# Altium PCB XbeeLight.PcbDoc
Units mil, origin at the board's own origin, x right, y up, seen from the top; angles counter-clockwise.
Board outline 6000 x 4000 mil, 2 copper layers (Top Layer, Bottom Layer); 81 components, 75 nets, 247 pads, 0 vias.
Unrouted connection lines stored in the file: 164.
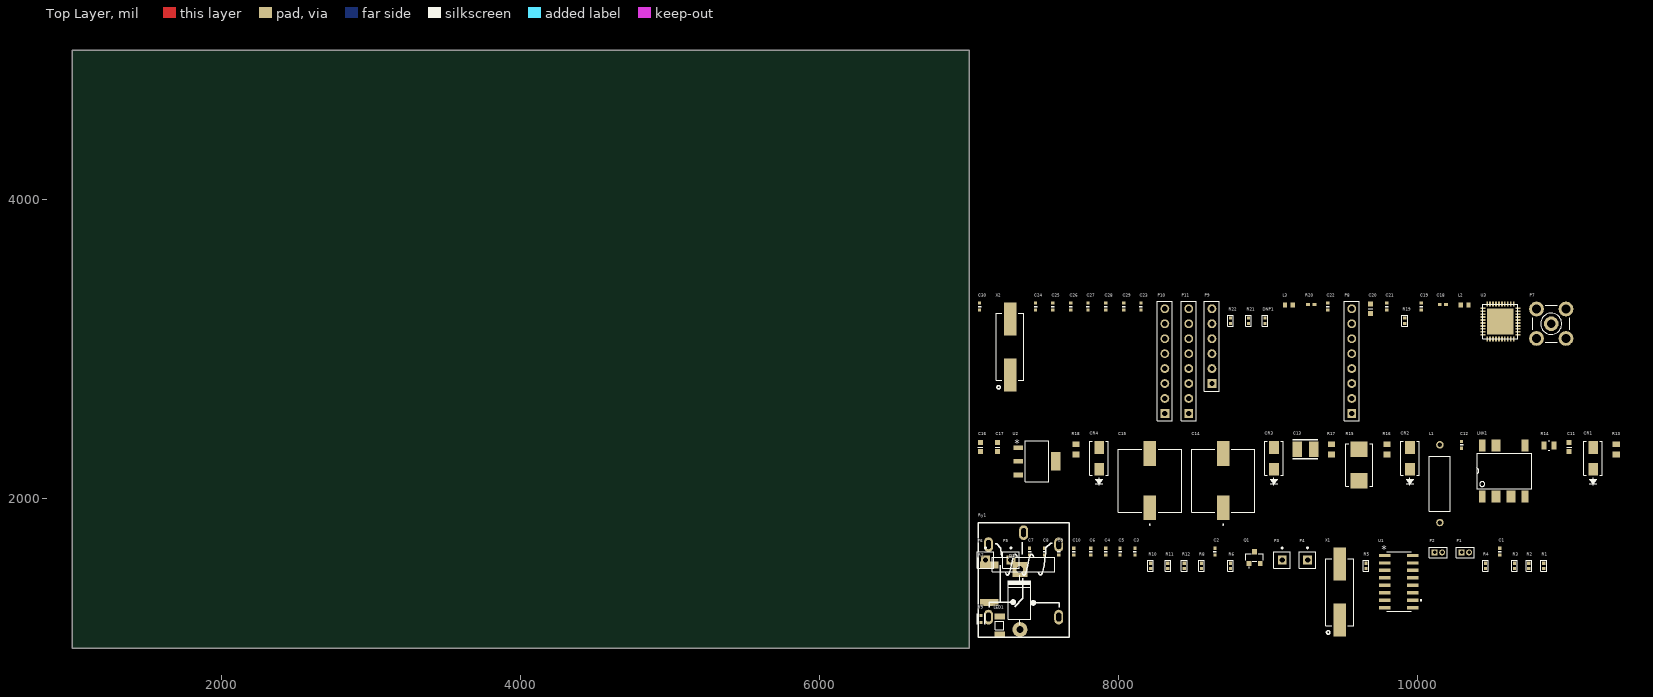
[diagram p0: Top Layer view]
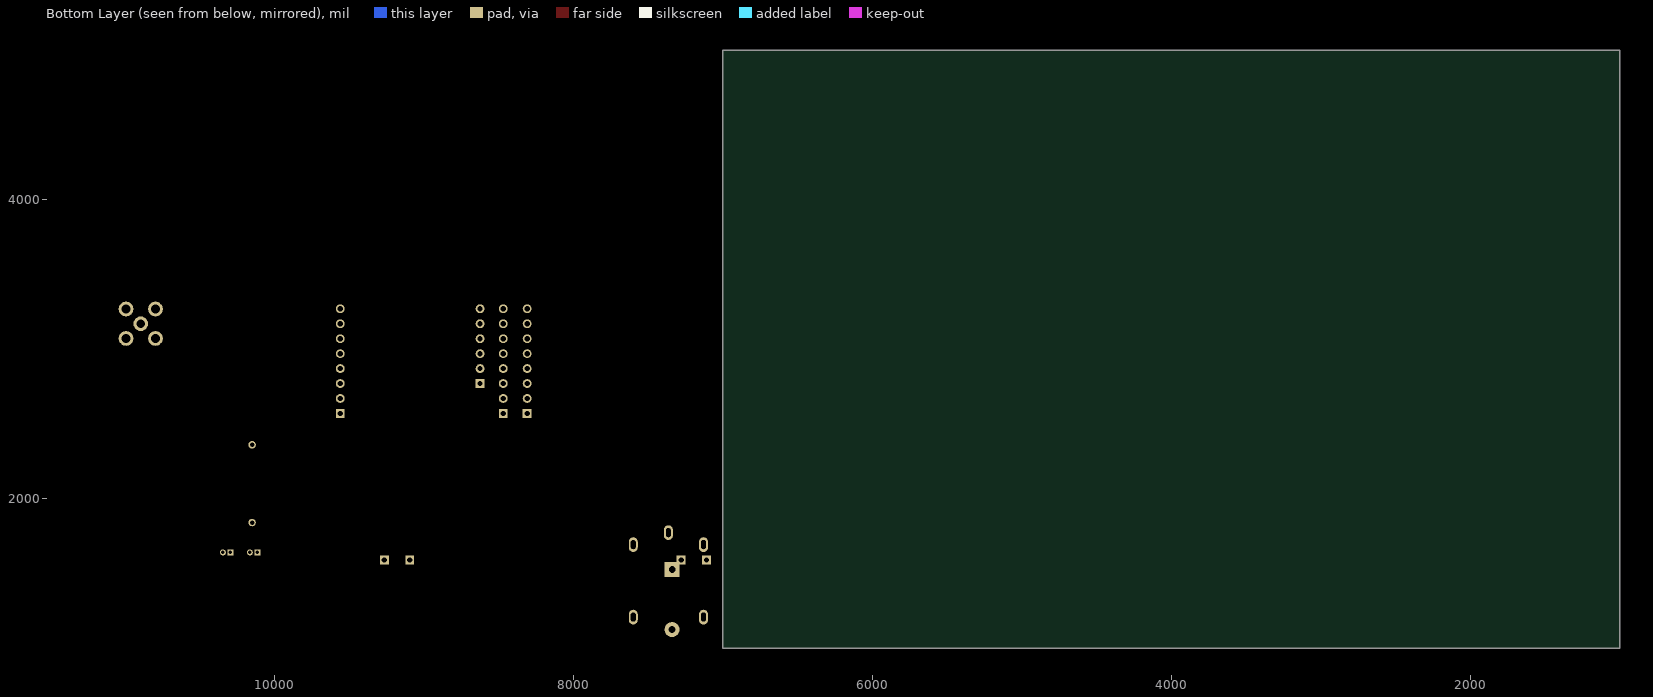
[diagram p1: Bottom Layer view, seen from below]

## Layer stack, top to bottom
Top Solder: solder mask 0.4, Solder Resist, Dk 3.5
Top Layer: signal copper 1.4
Dielectric 1: dielectric 12.6, FR-4, Dk 4.8
Bottom Layer: signal copper 1.4
Bottom Solder: solder mask 0.4, Solder Resist, Dk 3.5

## Board outline
1000,1000 7000,1000 7000,5000 1000,5000

## Design rules (kind name [scope] priority, off if disabled: settings)
Clearance [All] p1: gap=10 ignorepadtopadclearanceinfootprint=FALSE except(0: Arc-Hole Track-Hole SMDPad-Hole THPad-Hole Via-Hole Fill-Hole Poly-Hole Region-Hole Text-Hole)
PolygonConnect [All] p1: connectstyle=Relief reliefconductorwidth=10 reliefentries=4 polygonreliefangle="90 Angle" airgapwidth=10
RoomDefinition XBeeLight [InComponentClass('XBeeLight')] p1: confinementstyle=ConfineIn formatcopy=TRUE lockcomponents=FALSE outline 7045,2510 11055,2510 11055,3385 7045,3385
RoomDefinition PowerMngt [InComponentClass('PowerMngt')] p2: confinementstyle=ConfineIn formatcopy=TRUE lockcomponents=FALSE outline 7045,1795 11375,1795 11375,2460 7045,2460
RoomDefinition PowerMeasurement [InComponentClass('PowerMeasurement')] p3: confinementstyle=ConfineIn formatcopy=TRUE lockcomponents=FALSE outline 7045,1060 10875,1060 10875,1745 7045,1745
RoutingVias [All] p1: holewidth=28 width=50 viastyle="Through Hole" minholewidth=28 minwidth=50 maxholewidth=28 maxwidth=50
SolderMaskExpansion [All] p1: expansion=4
Width [All] p1: maxlimit=10 minlimit=10 preferedwidth=10
30 further rules are at their usual default settings.

## Classes and differential pairs
component class XBeeLight: C18 C19 C20 C21 C22 C23 C24 C25 C26 C27 C28 C29 C30 DNP1 L2 L3 P7 P8 P9 P10 P11 R19 R20 R21 R22 U3 X2
component class PowerMngt: C11 C12 C13 C14 C15 C16 C17 CR1 CR2 CR3 CR4 L1 LNK1 R13 R14 R15 R16 R17 R18 U2
component class PowerMeasurement: C1 C2 C3 C4 C5 C6 C7 C8 C9 C10 D1 LED1 P1 P2 P3 P4 P5 P6 Q1 R1 R2 R3 R4 R5 R6 R7 R8 R9 R10 R11 R12 Ry1 U1 X1

## Components (designator, comment, footprint, x,y, rotation, side; value= is the part's Value field where it differs from the comment)
C1 "0.10µF" SMD-0402C 10550,1645 r0 top
C2 "0.10µF" SMD-0402C 8645,1645 r0 top
C3 "0.10µF" SMD-0402C 8110,1645 r0 top
C4 "0.022µF" SMD-0402C 7915,1645 r0 top
C5 "0.022µF" SMD-0402C 8010,1645 r0 top
C6 "0.10µF" SMD-0402C 7815,1645 r0 top
C7 "220pF" SMD-0402C 7405,1645 r0 top
C8 "220pF" SMD-0402C 7505,1645 r0 top
C9 "220pF" SMD-0402C 7600,1645 r0 top
C10 "220pF" SMD-0402C 7700,1645 r0 top
C11 "1µF" SMD-0603C 11015,2345 r0 top
C12 "0.10µF" SMD-0402C 10295,2360 r0 top
C13 "47µF" SMD-1210C 9250,2330 r0 top
C14 "4.7uF 400V" CAP_PAN_EEE_G17 8700,2120 r90 top value=Value
C15 "4.7uF 400V" CAP_PAN_EEE_G17 8210,2120 r90 top value=Value
C16 "10µF" SMD-0603C 7075,2345 r0 top
C17 "10µF" SMD-0603C 7190,2345 r0 top
C18 "47pF" CC0402N 10170,3300 r0 top value=Value
C19 "0.10µF" SMD-0402C 10025,3285 r0 top
C20 "10µF" SMD-0603C 9685,3270 r0 top
C21 "0.10µF" SMD-0402C 9795,3285 r0 top
C22 "0.10µF" SMD-0402C 9400,3285 r0 top
C23 "15pF" SMD-0402C 8150,3285 r0 top
C24 "0.10µF" SMD-0402C 7445,3285 r0 top
C25 "0.10µF" SMD-0402C 7560,3285 r0 top
C26 "0.10µF" SMD-0402C 7680,3285 r0 top
C27 "0.10µF" SMD-0402C 7795,3285 r0 top
C28 "47pF" SMD-0402C 7915,3285 r0 top
C29 "0.10µF" SMD-0402C 8035,3285 r0 top
C30 "15pF" SMD-0402C 7070,3285 r0 top
CR1 "S1M-13-F" SMA 11175,2270 r90 top value=Value
CR2 "S1M-13-F" SMA 9950,2270 r90 top value=Value
CR3 "US1J-13-F" SMA 9040,2270 r90 top value=Value
CR4 "S1M-13-F" SMA 7870,2270 r90 top value=Value
D1 "1N4007" D2A 7340,1325 r90 top
DNP1 "10K" "MCS 0402" 8980,3190 r90 top
L1 "1.5mH 130mA" AIAP-01 10150,2360 r90 top value=Value
L2 "5.1uH" INDC1005X45 10315,3295 r0 top
L3 "3.9nH" INDC1005X45 9140,3295 r0 top
LED1 "Blue LED SMD" "1206 Blue LED SMD" 7205,1150 r90 top
LNK1 "LNK302GN-TL" SMD-8B 10580,2185 r90 top
P1 "MHDR1X2" MHDR1X2 10295,1640 r0 top
P2 "MHDR1X2" MHDR1X2 10115,1640 r0 top
P3 "Plug" PIN1 9095,1590 r0 top
P4 "Plug" PIN1 9265,1590 r0 top
P5 "Plug" PIN1 7280,1590 r0 top
P6 "Plug" PIN1 7110,1590 r0 top
P7 "SMB" SMB_V-RJ45 10895,3170 r0 top
P8 "Header 8" HDR1X8 9560,2570 r90 top
P9 "Header 6" HDR1X6 8625,2770 r90 top
P10 "Header 8" HDR1X8 8310,2570 r90 top
P11 "Header 8" HDR1X8 8470,2570 r90 top
Q1 "S8050" SI2305TP 8910,1605 r0 top
R1 "422K" "MCS 0402" 10845,1550 r90 top
R2 "4K7" "MCS 0402" 10745,1550 r90 top
R3 "100R" "MCS 0402" 10650,1550 r90 top
R4 "422K" "MCS 0402" 10455,1550 r90 top
R5 "422K" "MCS 0402" 9655,1550 r90 top
R6 "422K" "MCS 0402" 8750,1550 r90 top
R7 "0.002" SMD-2512-RES 7135,1430 r90 top
R8 "1K" "MCS 0402" 8555,1550 r90 top
R9 "0.0" SMD-0402-RES 7080,1195 r0 top
R10 "1K" "MCS 0402" 8215,1550 r90 top
R11 "1K" "MCS 0402" 8330,1550 r90 top
R12 "1K" "MCS 0402" 8440,1550 r90 top
R13 "11K" RC0805N 11330,2330 r90 top value=Value
R14 "1K82" RES_ERA6A_0805 10880,2355 r0 top value=Value
R15 "8.2 2W" RES_SMF2_TYCO 9610,2225 r90 top value=Value
R16 "220R" RC0805N 9795,2330 r90 top value=Value
R17 "3K3" RC0805N 9425,2330 r90 top value=Value
R18 "220R" RC0805N 7715,2330 r90 top value=Value
R19 "10K" "MCS 0402" 9915,3190 r90 top
R20 "43K 1%" RC0402N 9290,3300 r0 top value=Value
R21 "10K" "MCS 0402" 8870,3190 r90 top
R22 "10K" "MCS 0402" 8750,3190 r90 top
Ry1 "Relay" SRD-05VDC-SL-C 7365,1490 r90 top
U1 "CS5490-ISZ" CIR-SOIC-16_W150 9875,1445 r0 top value=Value
U2 "LM1117-3.3V" MP04A 7455,2250 r0 top value=Value
U3 "JN5168/A02Z" QFN50P600X600X100-41N_JN5168/A02Z(Primary) 10555,3185 r0 top
X1 "4.096MHZ" XTAL_ABLS2-4.096MHZ-D4Y-T 9480,1375 r90 top
X2 "4.096MHZ" XTAL_ABLS2-4.096MHZ-D4Y-T 7275,3015 r90 top

## Footprints (in the part's own frame and the unit in brackets; to place one, negate y for a bottom-side part, rotate by r counter-clockwise, add the part's x,y. Pads: shape width x height; smd on the part's side, far side on the other; paste and mask are expansions set on the pad)
"1206 Blue LED SMD" [mm] "Led SMD Blanco"
  rect 1x1.8 smd: 1(-1.5,0) 2(1.575,0)
  silkscreen extent -0.7,-0.7 0.77,0.72, body extent -1.47,-0.8 1.73,0.8, height 0.7
AIAP-01 [mil]
  round 50 hole 30 mask+0: 1(-520,0) 2(0,0)
  silkscreen extent -445,-70 -75,70, body extent 0,0 10,10, height 10
CAP_PAN_EEE_G17 [mil]
  rect 166x83 smd paste+0 mask+0: 1(-181,0) 2(181,0)
  silkscreen extent -297,-212 212,212, body extent 0,0 10,10, height 10
CC0402N [mil]
  rect 26x20 smd paste+0 mask+0: 1(-21,0) 2(21,0)
  body extent 0,0 10,10, height 10
CIR-SOIC-16_W150 [mil]
  rect 78x22 smd paste+0 mask+0: 1(-93,175) 2(-93,125) 3(-93,75) 4(-93,25) 5(-93,-25) 6(-93,-75) 7(-93,-125) 8(-93,-175) 9(93,-175) 10(93,-125) 11(93,-75) 12(93,-25) 13(93,25) 14(93,75) 15(93,125) 16(93,175)
  silkscreen extent -82,-200 152,200, body extent 0,0 10,10, height 10
D2A [mil] "Diode 2A, W 150mil, L 450mil"
  round 100 hole 45: 1(-201.3,-0.4)
  rect 100x100 hole 45: 2(201.49,0.59)
  silkscreen extent -169,-74 161,76, body extent -213,-53 217,48, height 100
HDR1X6 [mm] "Connector; Header; 6 Position"
  rect 1.5x1.5 hole 0.9: 1(0,0)
  round 1.5 hole 0.9: 2(2.54,0) 3(5.08,0) 4(7.62,0) 5(10.16,0) 6(12.7,0)
  silkscreen extent -1.27,-1.27 13.97,1.27
HDR1X8 [mm] "Connector; Header; 8 Position"
  rect 1.5x1.5 hole 0.9: 1(0,0)
  round 1.5 hole 0.9: 2(2.54,0) 3(5.08,0) 4(7.62,0) 5(10.16,0) 6(12.7,0) 7(15.24,0) 8(17.78,0)
  silkscreen extent -1.27,-1.27 19.05,1.27
INDC1005X45 [mm]
  rect 0.7x0.9 smd: 1(-0.65,0) 2(0.65,0)
"MCS 0402" [mm]
  rect 0.55x0.55 smd: 1(-0.45,0) 2(0.45,0)
  silkscreen extent -0.92,-0.48 0.95,0.48, body extent -0.5,-0.25 0.5,0.25, height 0.32
MHDR1X2 [mm] "Connector; Header; 2 Position"
  rect 1x1 hole 0.6: 1(0,0)
  round 1 hole 0.6: 2(1.27,0)
  silkscreen extent -0.9,-0.9 2.17,0.9
MP04A [mil]
  rect 63x33 smd paste+0 mask+0: 1(-126,90.55) 2(-126,0) 3(-126,-90.55)
  rect 63x122 smd paste+0 mask+0: 4(126,0)
  silkscreen extent -78,-137 78,137, body extent 0,0 10,10, height 10
PIN1 [mm] "Connector; Plug"
  rect 1.5x1.5 hole 0.9: 1(0,0)
  silkscreen extent -1.4,-1.4 1.4,2.17
QFN50P600X600X100-41N_JN5168/A02Z(Primary) [mm]
  rect 0.85x0.3 smd: 1(-3,2.25) 2(-3,1.75) 3(-3,1.25) 4(-3,0.75) 5(-3,0.25) 6(-3,-0.25) 7(-3,-0.75) 8(-3,-1.25) 9(-3,-1.75) 10(-3,-2.25) 21(3,-2.25) 22(3,-1.75) 23(3,-1.25) 24(3,-0.75) 25(3,-0.25) 26(3,0.25) 27(3,0.75) 28(3,1.25) 29(3,1.75) 30(3,2.25)
  rect 0.3x0.85 smd: 11(-2.25,-3) 12(-1.75,-3) 13(-1.25,-3) 14(-0.75,-3) 15(-0.25,-3) 16(0.25,-3) 17(0.75,-3) 18(1.25,-3) 19(1.75,-3) 20(2.25,-3) 31(2.25,3) 32(1.75,3) 33(1.25,3) 34(0.75,3) 35(0.25,3) 36(-0.25,3) 37(-0.75,3) 38(-1.25,3) 39(-1.75,3) 40(-2.25,3)
  rect 4.5x4.5 smd: EXP(0,0)
  silkscreen extent -2.97,-2.97 2.97,2.97
RC0402N [mm]
  rect 0.656x0.5 smd paste+0 mask+0: 1(-0.553,0) 2(0.553,0)
  body extent 0,0 0.25,0.25, height 0.25
RC0805N [mm]
  rect 1.006x1.2 smd paste+0 mask+0: 1(-0.853,0) 2(0.853,0)
  body extent 0,0 0.25,0.25, height 0.25
RES_ERA6A_0805 [mil]
  rect 34x53 smd paste+0 mask+0: 1(-34.5,0) 2(34.5,0)
  silkscreen extent -5,-32 5,32, body extent 0,0 10,10, height 10
RES_SMF2_TYCO [mil]
  rect 102.5x114 smd paste+0 mask+0: 1(-106.25,0) 2(106.25,0)
  silkscreen extent -143,-90 143,90, body extent 0,0 10,10, height 10
SI2305TP [mm]
  rect 0.8x0.9 smd: 1(-0.95,-1) 2(0.95,-1) 3(0,1)
  silkscreen extent -1.46,-1.75 1.46,0.65
SMA [mm]
  rect 2.18x1.63 smd paste+0 mask+0: 1(-1.857,0) 2(1.857,0)
  silkscreen extent -4.57,-1.59 2.92,1.59, body extent 0,0 0.25,0.25, height 0.25
SMB_V-RJ45 [mm] "Connector; SMB Straight"
  round 2.5 hole 1.5: 1(0,0) 2(-2.5,-2.5) 2(-2.5,2.5) 2(2.5,-2.5) 2(2.5,2.5)
  silkscreen extent -3.15,-3.15 3.15,3.15
SMD-8B [mil]
  rect 80x60 smd: BP(-170,-47) S2(-170,54) S3(170,54)
  rect 80x46 smd: D(170,-139.25) FB(-170,-139.25) S1(-170,146.75) S4(170,146.75)
  silkscreen extent -120,-184 120,184
SMD-0402-RES [mm]
  rect 0.55x0.55 smd: 1(0,0.584) 2(0,-0.584)
  silkscreen extent -0.6,-0.9 0.6,0.9, body extent -0.28,-0.57 0.27,0.58, height 0.41
SMD-0402C [mm]
  rect 0.55x0.55 smd: 1(0,0.584) 2(0,-0.584)
  silkscreen extent -0.25,0 0.25,0, body extent -0.25,-0.51 0.25,0.51, height 0.51
SMD-0603C [mm]
  rect 0.85x0.85 smd: 1(0,0.775) 2(0,-0.775)
  silkscreen extent -0.4,0 0.4,0, body extent -0.4,-0.8 0.4,0.8, height 0.9
SMD-1210C [mm]
  rect 1.6x2.7 smd: 1(-1.4,0) 2(1.4,0)
  silkscreen extent -2.12,-1.63 2.12,1.63, body extent -2,-1.22 2,1.27, height 1.7
SMD-2512-RES [mil]
  rect 49x125 smd: 1(-125.5,0) 2(125.5,0)
  silkscreen extent -125,-75 125,75, body extent -125,-59 125,59, height 63
SRD-05VDC-SL-C [mil] "Relevador compacto de 1 polo, 2 tiros (SPDT) y bobina de 5 Vcc"
  oval 98.43x60 hole 31.5 slot 59.06 at 0 deg: 1(202.5,-235) 2(202.5,235) 3(-282.5,235) 4(282.5,0) 5(-282.5,-235)
  silkscreen extent -418,-305 350,305, body extent -418,-305 338,301, height 591
XTAL_ABLS2-4.096MHZ-D4Y-T [mm]
  rect 5.6x2.1 smd: 1(-4.75,0) 2(4.75,0)
  silkscreen extent -7.15,-2.35 5.7,2.35

## Part data
C1 C2 C3 C6 C12 C19 C21 C22 C24 C25 C26 C27 C29: library part GCM155R71C104KA55D, "CAP CER 0.1UF 16V X7R 0402", Digi-Key Part Number=490-4759-1-ND, Manufacturer="Murata Electronics North America", Operating Temperature="-55°C ~ 125°C", Package / Case="0402 (1005 Metric)", Ratings=AEC-Q200, Temperature Coefficient=X7R, Tolerance=±10%, Voltage=16V, @ qty=0, Applications=Automotive, Datasheets=http://www.murata.com/~/media/webrenewal/support/library/catalog/products/capacitor/mlcc/c03e.ashx, Factory Stock=0, Features=-, Height - Seated (Max)=-, Image=//media.digikey.com/Renders/Murata%20Renders/ZRB-SERIES-0402.jpg, Lead Spacing=-, Lead Style=-, Minimum Quantity=1, Mounting Type="Surface Mount, MLCC", Packaging="Cut Tape (CT)", Part Number=GCM155R71C104KA55D, Part Status=Active, Quantity Available=734194, Series=GCM, Size / Dimension="0.039\" L x 0.020\" W (1.00mm x 0.50mm)", Thickness (Max)="0.022\" (0.55mm)", Unit Price (USD)=0.1
C4 C5: library part GCM155R71H223KA55D, "CAP CER 0.022UF 50V X7R 0402", Digi-Key Part Number=490-4763-1-ND, Manufacturer="Murata Electronics North America", Operating Temperature="-55°C ~ 125°C", Package / Case="0402 (1005 Metric)", Ratings=AEC-Q200, Temperature Coefficient=X7R, Tolerance=±10%, Voltage=50V, @ qty=0, Applications=Automotive, Datasheets=http://www.murata.com/~/media/webrenewal/support/library/catalog/products/capacitor/mlcc/c03e.ashx, Factory Stock=0, Features=-, Height - Seated (Max)=-, Image=//media.digikey.com/Renders/Murata%20Renders/ZRB-SERIES-0402.jpg, Lead Spacing=-, Lead Style=-, Minimum Quantity=1, Mounting Type="Surface Mount, MLCC", Packaging="Cut Tape (CT)", Part Number=GCM155R71H223KA55D, Part Status=Active, Quantity Available=203538, Series=GCM, Size / Dimension="0.039\" L x 0.020\" W (1.00mm x 0.50mm)", Thickness (Max)="0.022\" (0.55mm)", Unit Price (USD)=0.1
C7 C8 C9 C10: library part GCM1555C1H221JA16D, "CAP CER 220PF 50V NP0 0402", Digi-Key Part Number=490-4927-1-ND, Manufacturer="Murata Electronics North America", Operating Temperature="-55°C ~ 125°C", Package / Case="0402 (1005 Metric)", Ratings=AEC-Q200, Temperature Coefficient="C0G, NP0", Tolerance=±5%, Voltage=50V, @ qty=0, Applications=Automotive, Datasheets=http://www.murata.com/~/media/webrenewal/support/library/catalog/products/capacitor/mlcc/c03e.ashx, Factory Stock=0, Features=-, Height - Seated (Max)=-, Image=//media.digikey.com/Renders/Murata%20Renders/ZRB-SERIES-0402.jpg, Lead Spacing=-, Lead Style=-, Minimum Quantity=1, Mounting Type="Surface Mount, MLCC", Packaging="Cut Tape (CT)", Part Number=GCM1555C1H221JA16D, Part Status=Active, Quantity Available=20733, Series=GCM, Size / Dimension="0.039\" L x 0.020\" W (1.00mm x 0.50mm)", Thickness (Max)="0.022\" (0.55mm)", Unit Price (USD)=0.1
C11: library part GRM188R61C105MA12D, "CAP CER 1UF 16V X5R 0603", Digi-Key Part Number=490-10480-1-ND, Manufacturer="Murata Electronics North America", Operating Temperature="-55°C ~ 85°C", Package / Case="0603 (1608 Metric)", Ratings=-, Temperature Coefficient=X5R, Tolerance=±20%, Voltage=16V, @ qty=0, Applications="General Purpose", Datasheets=http://www.murata.com/~/media/webrenewal/support/library/catalog/products/capacitor/mlcc/c02e.pdf, Factory Stock=0, Features="Derating Recommended", Height - Seated (Max)=-, Image=//media.digikey.com/Renders/Murata%20Renders/ZRB-SERIES-0402.jpg, Lead Spacing=-, Lead Style=-, Minimum Quantity=1, Mounting Type="Surface Mount, MLCC", Packaging="Cut Tape (CT)", Part Number=GRM188R61C105MA12D, Part Status=Active, Quantity Available=3593, Series=GRM, Size / Dimension="0.063\" L x 0.031\" W (1.60mm x 0.80mm)", Thickness (Max)="0.035\" (0.90mm)", Unit Price (USD)=0.1
C13: library part GRM32EC81C476KE15L, "CAP CER 47UF 16V X6S 1210", Digi-Key Part Number=490-10531-1-ND, Manufacturer="Murata Electronics North America", Operating Temperature="-55°C ~ 105°C", Package / Case="0.126\" L x 0.098\" W (3.20mm x 2.50mm)", Ratings=-, Temperature Coefficient=X6S, Tolerance=±10%, Voltage=16V, @ qty=0, Applications="General Purpose", Datasheets=http://www.murata.com/~/media/webrenewal/support/library/catalog/products/capacitor/mlcc/c02e.pdf, Factory Stock=0, Failure Rate="Surface Mount, MLCC", Features="Derating Recommended", Height - Seated (Max)="0.106\" (2.70mm)", Image=//media.digikey.com/Renders/Murata%20Renders/1210-32E.jpg, Lead Spacing=-, Minimum Quantity=1, Mounting Type="1210 (3225 Metric)", Packaging="Cut Tape (CT)", Part Number=GRM32EC81C476KE15L, Part Status=Active, Quantity Available=396, Series=GRM, Size / Dimension=-, Thickness (Max)=-, Unit Price (USD)=0.73
C14 C15: library part EEV-EB2G4R7Q, "Imported", Built_By=EMA_UL_Team, C="Copyright (C) 2015 Accelerated Designs. All rights reserved", Manufacturer_Part_Number=EEV-EB2G4R7Q, RefDes=RefDes, Type=DEV, Vendor=Panasonic
C16 C17 C20: library part GRM188R60J106KE47D, "CAP CER 10UF 6.3V X5R 0603", Digi-Key Part Number=490-12538-1-ND, Manufacturer="Murata Electronics North America", Operating Temperature="-55°C ~ 85°C", Package / Case="0603 (1608 Metric)", Ratings=-, Temperature Coefficient=X5R, Tolerance=±10%, Voltage=6.3V, @ qty=0, Applications="General Purpose", Datasheets=http://www.murata.com/~/media/webrenewal/support/library/catalog/products/capacitor/mlcc/c02e.pdf, Factory Stock=0, Features=-, Height - Seated (Max)=-, Image=//media.digikey.com/Renders/Murata%20Renders/ZRB-SERIES-0402.jpg, Lead Spacing=-, Lead Style=-, Minimum Quantity=1, Mounting Type="Surface Mount, MLCC", Packaging="Cut Tape (CT)", Part Number=GRM188R60J106KE47D, Part Status=Active, Quantity Available=3805, Series=GRM, Size / Dimension="0.063\" L x 0.031\" W (1.60mm x 0.80mm)", Thickness (Max)="0.035\" (0.90mm)", Unit Price (USD)=0.13
C18: library part CC0402JRNPO9BN47, "Imported", Manufacturer_Part_Number=CC0402JRNPO9BN470, Built_By=EMA_UL_Team, C="Copyright (C) 2015 Accelerated Designs. All rights reserved", RefDes=RefDes, Type=DEV, Vendor=Yageo
C23 C30: library part GJM1555C1H150FB01D, "CAP CER 15PF 50V NP0 0402", Digi-Key Part Number=490-11191-1-ND, Manufacturer="Murata Electronics North America", Operating Temperature="-55°C ~ 125°C", Package / Case="0402 (1005 Metric)", Ratings=-, Temperature Coefficient="C0G, NP0", Tolerance=±1%, Voltage=50V, @ qty=0, Applications="RF, Microwave, High Frequency", Datasheets=http://www.murata.com/~/media/webrenewal/support/library/catalog/products/capacitor/mlcc/c02e.pdf, Factory Stock=0, Features="High Q, Low Loss", Height - Seated (Max)=-, Image=//media.digikey.com/Renders/Murata%20Renders/ZRB-SERIES-0402.jpg, Lead Spacing=-, Lead Style=-, Minimum Quantity=1, Mounting Type="Surface Mount, MLCC", Packaging="Cut Tape (CT)", Part Number=GJM1555C1H150FB01D, Part Status=Active, Quantity Available=36038, Series=GJM, Size / Dimension="0.039\" L x 0.020\" W (1.00mm x 0.50mm)", Thickness (Max)="0.022\" (0.55mm)", Unit Price (USD)=0.21
C28: library part GCM1555C1H470JA16D, "CAP CER 47PF 50V NP0 0402", Digi-Key Part Number=490-10670-1-ND, Manufacturer="Murata Electronics North America", Operating Temperature="-55°C ~ 125°C", Package / Case="0402 (1005 Metric)", Ratings=AEC-Q200, Temperature Coefficient="C0G, NP0", Tolerance=±5%, Voltage=50V, @ qty=0, Applications=Automotive, Datasheets=http://www.murata.com/~/media/webrenewal/support/library/catalog/products/capacitor/mlcc/c03e.ashx, Factory Stock=0, Features=-, Height - Seated (Max)=-, Image=//media.digikey.com/Renders/Murata%20Renders/ZRB-SERIES-0402.jpg, Lead Spacing=-, Lead Style=-, Minimum Quantity=1, Mounting Type="Surface Mount, MLCC", Packaging="Cut Tape (CT)", Part Number=GCM1555C1H470JA16D, Part Status=Active, Quantity Available=171, Series=GCM, Size / Dimension="0.039\" L x 0.020\" W (1.00mm x 0.50mm)", Thickness (Max)="0.022\" (0.55mm)", Unit Price (USD)=0.1
CR1 CR2 CR3 CR4 U1: "Imported", Built_By=EMA_UL_Team, RefDes=RefDes, Type=DEV
  CR1 CR2 CR4: C="Copyright (C) 2015 Accelerated Designs. All rights reserved", Manufacturer_Part_Number=S1M-13-F, Vendor="Diodes Inc"
  CR3: C="Copyright (C) 2015 Accelerated Designs. All rights reserved", Manufacturer_Part_Number=US1J-13-F, Vendor="Diodes Inc"
  U1: Manufacturer_Part_Number=CS5490-ISZ, Vendor="Cirrus Logic"
D1: "Diode 1A"
DNP1 R19 R21 R22: library part "10K Res", "Res Thin Film 0402 10K Ohm 0.5% 0.063W(1/16W) ±25ppm/C Molded SMD Automotive Punched T/R", Manufacturer=Panasonic, Manufacturer Part Number=ERA-2AED103X, Rated Power="0.063 W", Resistance="10 kO", Supplier Part Number 1=P10KDECT-ND, Temp Coefficient="±25 ppm/°C", Tolerance (%)="±0.5 %", ComponentLink1Description=https://datasheet.ciiva.com/43470/1776116-43470437.pdf, ComponentLink1URL=https://datasheet.ciiva.com/43470/1776116-43470437.pdf, ComponentLink2Description=https://datasheet.ciiva.com/7830/1776116-7830919.pdf, ComponentLink2URL=https://datasheet.ciiva.com/7830/1776116-7830919.pdf, ComponentLink3Description=https://datasheet.ciiva.com/30240/54aoa0000ce26-30240474.pdf, ComponentLink3URL=https://datasheet.ciiva.com/30240/54aoa0000ce26-30240474.pdf, ComponentLink4Description=https://datasheet.ciiva.com/46378/1776116-46378235.pdf, ComponentLink4URL=https://datasheet.ciiva.com/46378/1776116-46378235.pdf, Pricing 1="1=0.22, 10=0.188, 100=0.0735, 1000=0.0308, 2500=0.0282, 5000=0.0256 (USD)", Size Code=0402, Stock 1=99513, Supplier 1=Digi-Key
L1: library part AIAP-01-152K-T, "Imported", Built_By=EMA_UL_Team, Manufacturer_Part_Number=AIAP-01-152K-T, RefDes=RefDes, Type=DEV, Vendor=Abracon
L2: library part LQP15MN5N1B02D, "Inductor RF Chip Unshielded Thin Film 5.1nH 0.1nH 500MHz 13Q-Factor Ceramic 140mA 700mOhm DCR 0402 T/R", Package="0402 Murata", Digi-Key_Part_Number=490-6758-1-ND, Digi-Key_Purchase_URL=https://www.digikey.lk/product-detail/en/murata-electronics-north-america/LQP15MN5N1B02D/490-6758-1-ND/3845955?utm_source=snapeda&utm_medium=aggregator&utm_campaign=symbol, MF=Murata, MP=LQP15MN5N1B02D, SnapEDA_Link=https://www.snapeda.com/parts/LQP15MN5N1B02D/Murata%20Electronics%20North%20America/view-part/?ref=snap
L3: library part LQP15MN3N9B02D, "FIXED IND 3.9NH 170MA 500 MOHM", Current Rating=170mA, DC Resistance (DCR)="500 mOhm Max", Frequency - Self Resonant=6GHz, Frequency - Test=500MHz, Manufacturer=Murata, Operating Temperature="-40°C ~ 85°C", Package / Case="0402 (1005 Metric)", Q @ Freq="13 @ 500MHz", Standard Package=10,000, Supplier Part Number 1=490-1131-1-ND, Tolerance=±0.1nH, Catalog Drawings="LQP15M Series Top LQP15M Series Side", Category="Inductors, Coils, Chokes", ComponentLink1Description=http://search.murata.co.jp/Ceramy/image/img/PDF/ENG/L0075S0084LQP15M.pdf, ComponentLink1URL=http://search.murata.co.jp/Ceramy/image/img/PDF/ENG/L0075S0084LQP15M.pdf, ComponentLink2Description=https://www.murata.com/~/media/webrenewal/support/library/catalog/products/inductor/chip/o05e.ashx, ComponentLink2URL=https://www.murata.com/~/media/webrenewal/support/library/catalog/products/inductor/chip/o05e.ashx, ComponentLink3Description=http://www.jameco.com/Jameco/Products/ProdDS/1865137.pdf, ComponentLink3URL=http://www.jameco.com/Jameco/Products/ProdDS/1865137.pdf, ComponentLink4Description=https://www.murata.com/~/media/webrenewal/support/library/catalog/products/inductor/chip/o05e.ashx?la=en-us, ComponentLink4URL=https://www.murata.com/~/media/webrenewal/support/library/catalog/products/inductor/chip/o05e.ashx?la=en-us, ComponentLink5Description=http://uk.rs-online.com/webdocs/0f15/0900766b80f155d9.pdf, ComponentLink5URL=http://uk.rs-online.com/webdocs/0f15/0900766b80f155d9.pdf, Family="Fixed Inductors", Height - Seated (Max)="0.018\" (0.45mm)", Inductance=3.9nH, Manufacturer Part Number=LQP15MN3N9B02D, Material - Core=Non-Magnetic, Mounting Type="Surface Mount", Online Catalog="LQP Series", Other Names="490-1131-2   / LQP10A3N9B02T1", Packaging="Tape & Reel (TR)", Pricing 1="1=0.19, 10=0.173, 100=0.1152, 500=0.096, 1000=0.0807, 2500=0.0691 (USD)", Product Training Modules="Inductor Products Chip RF Inductors", Series=LQP15M, Shielding=Unshielded, Size / Dimension="0.039\" L x 0.020\" W (1.00mm x 0.50mm)", Stock 1=110804, Supplier 1=Digi-Key, Type="Thin Film"
LNK1: "IC OFFLINE SWIT OCP 8SMD", Frequency Range="62kHz ~ 70kHz", Manufacturer="Power Integrations", Operating Temperature="-40°C ~ 150°C", Package / Case="8-SMD (7 Leads), Gull Wing", Power (Watts)=12mW, Standard Package=1,000, Supplier Device Package=SMD-8B, Supplier Part Number 1=596-1020-1-ND, Voltage - Breakdown=700V, Voltage - Input=-, Category="Integrated Circuits (ICs)", ComponentLink1Description=http://www.powerint.com/sites/default/files/product-docs/lnk302_304-306.pdf, ComponentLink1URL=http://www.powerint.com/sites/default/files/product-docs/lnk302_304-306.pdf, ComponentLink2Description=https://www.power.com/sites/default/files/product-docs/lnk302_304-306.pdf, ComponentLink2URL=https://www.power.com/sites/default/files/product-docs/lnk302_304-306.pdf, ComponentLink3Description=http://www.power.com/sites/default/files/product-docs/lnk302_304-306.pdf, ComponentLink3URL=http://www.power.com/sites/default/files/product-docs/lnk302_304-306.pdf, Dynamic Catalog="AC DC Converters, Offline Switchers", Family="PMIC - AC DC Converters, Offline Switchers", Manufacturer Part Number=LNK302GN-TL, Online Catalog="AC DC Converters, Offline Switchers", Other Names="596-1020-2 / LNK302GNTL", Output Isolation=Non-Isolated, Packaging="Tape & Reel (TR)", Pricing 1="1=1.35, 10=1.193, 25=1.0776, 100=0.9428, 250=0.8273, 500=0.7311 (USD)", Reference Design Library="DER-092: 4 LEDs @ 40mA, 0.5W, 85 ~ 265VAC in", Series=LinkSwitch®-TN, Stock 1=53740, Supplier 1=Digi-Key, Voltage - Output=-
P1 P2: "Header, 2-Pin", LatestRevisionDate=17-Jul-2002, LatestRevisionNote="Re-released for DXP Platform.", Publisher="Altium Limited"
P7: "SMB Straight Connector", LatestRevisionDate=17-Jul-2002, LatestRevisionNote="Re-released for DXP Platform.", Publisher="Altium Limited"
P8 P10 P11: "Header, 8-Pin", LatestRevisionDate=17-Jul-2002, LatestRevisionNote="Re-released for DXP Platform.", Publisher="Altium Limited"
P9: "Header, 6-Pin", LatestRevisionDate=17-Jul-2002, LatestRevisionNote="Re-released for DXP Platform.", Publisher="Altium Limited"
Q1: library part MMSS8050-H-TP, "TRANS NPN 25V 1.5A SOT23", Current - Collector (Ic) (Max)=1.5A, Current - Collector Cutoff (Max)=100nA, DC Current Gain (hFE) (Min) @ Ic, Vce="120 @ 100mA, 1V", Frequency - Transition=100MHz, Manufacturer=MCC, Package / Case="TO-236-3, SC-59, SOT-23-3", Power - Max=625mW, Standard Package=3,000, Supplier Device Package=SOT-23, Supplier Part Number 1=MMSS8050-H-TPMSCT-ND, Voltage - Collector Emitter Breakdown (Max)=25V, Category="Discrete Semiconductor Products", ComponentLink1Description=http://www.mouser.com/ds/2/258/MMSS8050-255048.pdf, ComponentLink1URL=http://www.mouser.com/ds/2/258/MMSS8050-255048.pdf, ComponentLink2Description=http://www.mccsemi.com/up_pdf/MMSS8050(SOT-23).pdf, ComponentLink2URL=http://www.mccsemi.com/up_pdf/MMSS8050(SOT-23).pdf, Family="Transistors (BJT) - Single", Manufacturer Part Number=MMSS8050-H-TP, Mounting Type="Surface Mount", Online Catalog="NPN Transistors", Other Names="MMSS8050-H-TP-ND MMSS8050-H-TPMSTR MMSS8050HTP Q6289485", Packaging="Tape & Reel (TR)", Pricing 1="1=0.21, 10=0.19, 25=0.1728, 100=0.1246, 250=0.0734, 500=0.0609, 1000=0.0415 (USD)", Series=-, Stock 1=2136, Supplier 1=Digi-Key, Transistor Type=NPN, Vce Saturation (Max) @ Ib, Ic="500mV @ 80mA, 800mA"
R1 R4 R5 R6: "RESISTOR, THICK FILM, 422KOHM, 100mW, ± 1%", Manufacturer=Panasonic, Manufacturer Part Number=ERJ-2RKF4223X, Operating Temperature="-55°C ~ 155°C", Package / Case="0402 (1005 Metric)", Power (Watts)="0.1W, 1/10W", Resistance (Ohms)=422k, Standard Package=1, Supplier Device Package=0402, Supplier Part Number 1=P422KLCT-ND, Temperature Coefficient=±100ppm/°C, Tolerance=±1%, Category=Resistors, ComponentLink1Description=http://www.farnell.com/datasheets/1678782.pdf, ComponentLink1URL=http://www.farnell.com/datasheets/1678782.pdf, ComponentLink2Description=http://industrial.panasonic.com/www-data/pdf/AOA0000/AOA0000CE2.pdf, ComponentLink2URL=http://industrial.panasonic.com/www-data/pdf/AOA0000/AOA0000CE2.pdf, ComponentLink3Description=http://www.mouser.com/ds/2/315/AOA0000C283-1093288.pdf, ComponentLink3URL=http://www.mouser.com/ds/2/315/AOA0000C283-1093288.pdf, Composition="Thick Film", EDA / CAD Models="Download from Accelerated Designs", Family="Chip Resistor - Surface Mount", Features="Automotive AEC-Q200", Height="0.016\" (0.40mm)", Kits="RSM5L-ND  - RES KIT 100K-1M 1/10W 4850PCS", Number of Terminations=2, Online Catalog="ERJ Series", Other Names="ERJ-2RKF4223 ERJ2RKF4223 P422KLCT", Packaging="Cut Tape (CT)", Pricing 1="1=0.1, 10=0.045, 100=0.0183, 1000=0.0082, 2500=0.0072, 5000=0.0059 (USD)", Series=ERJ, Size / Dimension="0.039\" L x 0.020\" W (1.00mm x 0.50mm)", Stock 1=90880, Supplier 1=Digi-Key
R2: library part "4K7 Res", "Panasonic ERA Series Thin Film Surface Mount Resistor 0402 Case 4.7k 0.1% 0.063W 25ppm/C", Manufacturer=Panasonic, Manufacturer Part Number=ERA-2AEB472X, Rated Power="0.063 W", Resistance="4.7 kO", Supplier Part Number 1=P4.7KDCCT-ND, Temp Coefficient="±25 ppm/°C", Tolerance (%)="±0.1 %", ComponentLink1Description=https://datasheet.ciiva.com/11811/0900766b80beefcc-11811886.pdf, ComponentLink1URL=https://datasheet.ciiva.com/11811/0900766b80beefcc-11811886.pdf, ComponentLink2Description=https://datasheet.ciiva.com/22640/328837-22640615.pdf, ComponentLink2URL=https://datasheet.ciiva.com/22640/328837-22640615.pdf, ComponentLink3Description=https://datasheet.ciiva.com/24023/aoa0000ce26-197354-24023865.pdf, ComponentLink3URL=https://datasheet.ciiva.com/24023/aoa0000ce26-197354-24023865.pdf, ComponentLink4Description=https://datasheet.ciiva.com/46399/328837-46399002.pdf, ComponentLink4URL=https://datasheet.ciiva.com/46399/328837-46399002.pdf, ComponentLink5Description=https://datasheet.ciiva.com/22743/1776116-22743051.pdf, ComponentLink5URL=https://datasheet.ciiva.com/22743/1776116-22743051.pdf, ComponentLink6Description=https://datasheet.ciiva.com/9117/aoa0000ce26-9117420.pdf, ComponentLink6URL=https://datasheet.ciiva.com/9117/aoa0000ce26-9117420.pdf, ComponentLink7Description=https://datasheet.ciiva.com/16759/70068849-16759180.pdf, ComponentLink7URL=https://datasheet.ciiva.com/16759/70068849-16759180.pdf, ComponentLink8Description=https://datasheet.ciiva.com/9117/aoa0000ce26-9117423.pdf, ComponentLink8URL=https://datasheet.ciiva.com/9117/aoa0000ce26-9117423.pdf, ComponentLink9Description=https://datasheet.ciiva.com/16395/aoa0000ce26-16395247.pdf, ComponentLink9URL=https://datasheet.ciiva.com/16395/aoa0000ce26-16395247.pdf, ComponentLink10Description=https://datasheet.ciiva.com/25723/1776116-25723855.pdf, ComponentLink10URL=https://datasheet.ciiva.com/25723/1776116-25723855.pdf, Pricing 1="1=0.43, 10=0.326, 100=0.137, 1000=0.0756, 2500=0.0709, 5000=0.0652 (USD)", Size Code=0402, Stock 1=111513, Supplier 1=Digi-Key
R3: "Res Thin Film 0402 100 Ohm 0.5% 0.063W(1/16W) ±25ppm/C Molded SMD Automotive Punched T/R", Manufacturer=Panasonic, Manufacturer Part Number=ERA-2AED101X, Operating Temperature="-55°C ~ 155°C", Package / Case="0402 (1005 Metric)", Power (Watts)="0.063W, 1/16W", Resistance (Ohms)=100, Standard Package=1, Supplier Device Package=0402, Supplier Part Number 1=P100DECT-ND, Temperature Coefficient=±25ppm/°C, Tolerance=±0.5%, Category=Resistors, ComponentLink1Description=http://www.mouser.com/ds/2/315/AOA0000C237-1100991.pdf, ComponentLink1URL=http://www.mouser.com/ds/2/315/AOA0000C237-1100991.pdf, ComponentLink2Description=http://www.farnell.com/datasheets/1776116.pdf, ComponentLink2URL=http://www.farnell.com/datasheets/1776116.pdf, ComponentLink3Description=http://industrial.panasonic.com/www-data/pdf/AOA0000/AOA0000CE26.pdf, ComponentLink3URL=http://industrial.panasonic.com/www-data/pdf/AOA0000/AOA0000CE26.pdf, Composition="Thin Film", EDA / CAD Models="Download from Accelerated Designs", Family="Chip Resistor - Surface Mount", Featured Product="ERA-xA Metal/Thin Film Chip Resistors Hot New Technologies Wearables Technology Components", Features="Automotive AEC-Q200", Height="0.016\" (0.40mm)", Number of Terminations=2, Online Catalog="ERA-2A Series", Other Names=P100DEDKR, Packaging=Digi-Reel®, Pricing 1="1=0.22, 10=0.188, 100=0.0735, 1000=0.0308, 2500=0.0282, 5000=0.0256 (USD)", Series=ERA-2A, Size / Dimension="0.039\" L x 0.020\" W (1.00mm x 0.50mm)", Stock 1=25171, Supplier 1=Digi-Key
R7: library part ERJ-MP4PF2M0U, "RES SMD 0.002 OHM 1% 2W 2512", Digi-Key Part Number=P19407CT-ND, Manufacturer="Panasonic Electronic Components", Operating Temperature="-65°C ~ 170°C", Package / Case="2512 (6432 Metric)", Power (Watts)=2W, Supplier Device Package=2512, Temperature Coefficient=±75ppm/°C, Tolerance=±1%, @ qty=1500, Composition="Metal Element", Datasheets=https://industrial.panasonic.com/cdbs/www-data/pdf/RDA0000/AOA0000C263.pdf, Factory Stock=0, Failure Rate=-, Features="Automotive AEC-Q200, Current Sense, Moisture Resistant", Height - Seated (Max)="0.035\" (0.89mm)", Image=//media.digikey.com/Photos/Panasonic%20Elect%20Works%20Photos/MFG_ERJ-MS4.jpg, Minimum Quantity=1, Number of Terminations=2, Packaging="Cut Tape (CT)", Part Number=ERJ-MP4PF2M0U, Part Status=Active, Quantity Available=1991, Series=ERJ, Size / Dimension="0.252\" L x 0.126\" W (6.40mm x 3.20mm)", Unit Price (USD)=0.22038
R8 R10 R11 R12: library part "1K Res", "RES SMD 1K OHM 5% 1/32W 01005", Case Code - in=01005, Case Code - mm=0402, Case Height="0.13 mm", Case Length="0.4 mm", Case Width="0.2 mm", Manufacturer=Panasonic, Manufacturer Part Number=ERJ-XGNJ102Y, Operating Temperature Range="- 55 C to + 125 C", Package / Case="01005 (0402 metric)", Power Rating="31 mW", Resistance="1 kOhms", Supplier Part Number 1=P1.0KAWCT-ND, Temperature Coefficient="200 PPM / C", Tolerance="5 %", Voltage Rating="15 V", Brand=Panasonic, ComponentLink1Description=https://datasheet.ciiva.com/9199/aoa0000ce1-9199077.pdf, ComponentLink1URL=https://datasheet.ciiva.com/9199/aoa0000ce1-9199077.pdf, ComponentLink2Description=https://datasheet.ciiva.com/6544/erjxgn-6544006.pdf, ComponentLink2URL=https://datasheet.ciiva.com/6544/erjxgn-6544006.pdf, ComponentLink3Description=https://datasheet.ciiva.com/17215/aoa0000ce1-17215353.pdf, ComponentLink3URL=https://datasheet.ciiva.com/17215/aoa0000ce1-17215353.pdf, ComponentLink4Description=https://datasheet.ciiva.com/6544/erjxgn-6544011.pdf, ComponentLink4URL=https://datasheet.ciiva.com/6544/erjxgn-6544011.pdf, ComponentLink5Description=https://datasheet.ciiva.com/30174/4aoa0000ce1-30174159.pdf, ComponentLink5URL=https://datasheet.ciiva.com/30174/4aoa0000ce1-30174159.pdf, Factory Pack Quantity=20000, Packaging=Reel, Pricing 1="1=0.4, 10=0.335, 100=0.131, 1000=0.0548, 2500=0.0503, 5000=0.0457 (USD)", Product="Thick Film Resistors SMD", Product Category="Thick Film Resistors - SMD", RoHS=Details, Series=ERJ, Stock 1=104433, Supplier 1=Digi-Key, Type="Thick Film Resistors SMD"
R9: library part ERJ-2GE0R00X, "RES SMD 0.0OHM JUMPER 1/10W 0402", Digi-Key Part Number=P0.0JCT-ND, Manufacturer="Panasonic Electronic Components", Operating Temperature="-55°C ~ 155°C", Package / Case="0402 (1005 Metric)", Power (Watts)="0.1W, 1/10W", Supplier Device Package=0402, Temperature Coefficient=-, Tolerance=Jumper, @ qty=1500, Composition="Thick Film", Datasheets=http://industrial.panasonic.com/www-cgi/jvcr13pz.cgi?E+PZ+3+AOA0001+ERJ2GE0R00X+7+WW, Factory Stock=0, Failure Rate=-, Features="Automotive AEC-Q200", Height - Seated (Max)="0.016\" (0.40mm)", Image=//media.digikey.com/Photos/Panasonic%20Photos/ERJ-PA2-Series.jpg, Minimum Quantity=1, Number of Terminations=2, Packaging="Cut Tape (CT)", Part Number=ERJ-2GE0R00X, Part Status=Active, Quantity Available=3152483, Series=ERJ, Size / Dimension="0.039\" L x 0.020\" W (1.00mm x 0.50mm)", Unit Price (USD)=0.00384
R13: library part ERA-6AEB113V, "Imported", Built_By=EMA_UL_Team, C="Copyright (C) 2015 Accelerated Designs. All rights reserved", Manufacturer_Part_Number=ERA-6AEB113V, RefDes=RefDes, Type=DEV, Vendor=Panasonic
R14: library part ERA-6AEB1821V, "Imported", Built_By=EMA_UL_Team, C="Copyright (C) 2015 Accelerated Designs. All rights reserved", Manufacturer_Part_Number=ERA-6AEB1821V, RefDes=RefDes, Type=DEV, Vendor=Panasonic
R15: library part SMW28R2JT, "Imported", Built_By=EMA_UL_Team, C="Copyright (C) 2015 Accelerated Designs. All rights reserved", Manufacturer_Part_Number=SMW28R2JT, RefDes=RefDes, Type=DEV, Vendor="TE Connectivity"
R16 R18: library part ERJ-P06J221V, "Imported", Built_By=EMA_UL_Team, C="Copyright (C) 2015 Accelerated Designs. All rights reserved", Manufacturer_Part_Number=ERJ-P06J221V, RefDes=RefDes, Type=DEV, Vendor=Panasonic
R17: library part ERA-6AEB332V, "Imported", Built_By=EMA_UL_Team, C="Copyright (C) 2015 Accelerated Designs. All rights reserved", Manufacturer_Part_Number=ERA-6AEB332V, RefDes=RefDes, Type=DEV, Vendor=Panasonic
R20: library part "Res 43K", "Imported", Manufacturer_Part_Number=ERJ-2RKF4302X, Built_By=EMA_UL_Team, C="Copyright (C) 2015 Accelerated Designs. All rights reserved", RefDes=RefDes, Type=DEV, Vendor=Panasonic
Ry1: library part SRD-05VDC-SL-C, "Songle Relay", LatestReviewer="Evan Green", LatestRevisionDate=02-Apr-2015, LatestRevisionNote="Component Created", Published=02-Apr-2015, Publisher="Cynetik Group"
U2: library part LM1117MPX-3.3/NO, "Imported", Manufacturer_Part_Number=LM1117MPX-3.3/NOPB, Built_By=EMA_UL_Team, RefDes=RefDes, Type=DEV, Vendor="National Semiconductor"
U3: "JN5168 - ZigBee, RF4CE, JenNet-IP and IEEE802.15.4 wireless microcontroller with 256 kB Flash, 32 kB RAM", Package=None, Availability=Unavailable, MF="NXP Semiconductors", MP=JN5168/A02Z, Price=None, SnapEDA_Link=https://www.snapeda.com/parts/JN5168/A02Z/NXP%20Semiconductors/view-part/?ref=snap
X1 X2: library part ABLS2-4.096MHZ-D4Y-T, "4.096MHz ±30ppm Crystal 18pF 180 Ohm -40°C ~ 85°C  Surface Mount HC49/US", Frequency="4.096 MHz", Frequency Stability="?30 ppm", Frequency Tolerance=?30, Load Capacitance="18 pF", Manufacturer=Abracon, Operating Temp Range="-40C to 85C", Package / Case=HC-49/US, Supplier Part Number 1=535-9858-1-ND, ComponentLink1Description=http://www.abracon.com/Resonators/ABLS2.pdf, ComponentLink1URL=http://www.abracon.com/Resonators/ABLS2.pdf, ComponentLink2Description=https://abracon.com/Resonators/ABLS2.pdf, ComponentLink2URL=https://abracon.com/Resonators/ABLS2.pdf, ComponentLink3Description=http://www.farnell.com/datasheets/1749648.pdf, ComponentLink3URL=http://www.farnell.com/datasheets/1749648.pdf, ESR="180 ohm", Manufacturer Part Number=ABLS2-4.096MHZ-D4Y-T, Mode of Oscillation=Fundamental, Mounting Style="Surface Mount", Packaging="Tape and Reel", Pricing 1="1=0.46, 10=0.385, 50=0.3466, 100=0.308, 500=0.2926 (USD)", Product Depth (mm)="4.7 mm", Product Length (mm)="11.4 mm", Screening Level=Industrial, Stock 1=6062, Supplier 1=Digi-Key, Type=Crystal
LED1: Category=LED, Latest Reviewer="Zion Blue", LatestRevisionDate=21-Jun-2014, LatestRevisionNote="Footprint Corrections", Mounting Technology="Surface Mount", Publisher="Cynetik Group"
P3 P4 P5 P6: LatestRevisionDate=17-Jul-2002, LatestRevisionNote="Re-released for DXP Platform.", Publisher="Altium Limited"

## Nets (pads, with @x,y where several pads share a name; then routed paths per layer and width w, separated by ;. In a path a pad name is that pad's centre, name@x,y a point inside that pad or via, vN(x,y) a via of type N, cw(c..) or ccw(c..) an arc to the next point about the centre after c; other vN are vias at no path point)
3V3: C2.2 C17.2 C19.1 C20.2 C21.1 P9.1 P11.1 R2.2 R3.2 R19.2 R21.2 R22.2 U1.11 U1.15 U2.2 U2.4 U3.9 U3.30
12V: C13.1 C16.2 CR1.2 L1.2 R17.1 U2.3
230V: P5.1 R15.2 Ry1.5
ADC1: P10.3 U3.15
ADC2: P10.4 U3.11
DIO1: P10.8 U3.17
DIO2: P10.7 U3.18
DIO3: P10.2 U3.19
DIO4: P9.3 U3.26
DIO5: DNP1.2 P9.4 U3.27
DIO6: P9.5 U3.28
DIO7: P9.6 U3.29
DIO8: P11.3 U3.31
DIO9: P11.4 U3.32
DIO10: P11.5 U3.33
DIO11: P11.6 U3.34
DIO12: P11.7 U3.36
DIO13: P11.8 U3.37
DIO16: P10.5 U3.1
DIO17: P10.6 U3.2
DIO18: P8.5 U3.23
DIO19: P8.1 R22.1 U3.24
DO0: P8.6 U3.20
DO1: P8.2 U3.22
GND: C1.2 C2.1 C3.1 C7.2 C8.1 C9.2 C10.1 C13.2 C15.1 C16.1 C17.1 C19.2 C20.1 C21.2 C22.2 C23.1 C24.2 C25.2 C26.2 C27.2 C28.2 C29.2 C30.1 CR3.2 P7.2 P8.4 P9.2 P10.1 P11.2 Q1.2 R8.1 R12.2 R17.2 R18.1 R20.2 U1.10 U2.1 U3.21 U3.39 U3.EXP
H\O\L\D\: P8.7
IIN+: C4.1 C7.1 R10.1 U1.5
IIN-: C4.2 C8.2 R11.1 U1.4
NetC3_2: C3.2 U1.16
NetC6_1: C6.1 U1.8
NetC6_2: C6.2 U1.9
NetC11_1: C11.1 CR1.1 R13.1
NetC11_2: C11.2 C12.2 CR3.1 L1.1 LNK1.S1 LNK1.S2 LNK1.S3 LNK1.S4 R14.2
NetC12_1: C12.1 LNK1.BP
NetC14_1: C14.1 CR4.2 R18.2
NetC14_2: C14.2 CR2.1 R16.2
NetC15_2: C15.2 LNK1.D R16.1
NetC18_1: C18.1 L2.1
NetC18_2: C18.2 L3.2 U3.13
NetCR2_2: CR2.2 R15.1
NetD1_1: D1.1 Q1.3 Ry1.2
NetD1_2: D1.2 Ry1.1
NetL2_2: L2.2 P7.1
NetLED1_1: LED1.1 R3.1
NetLED1_2: LED1.2 U1.12
NetLNK1_FB: LNK1.FB R13.2 R14.1
NetP4_1: P4.1 R7.2 R10.2
NetR1_1: R1.1 R4.2
NetR4_1: R4.1 R5.2
NetR5_1: R5.1 R6.2
NetR6_1: R6.1 R8.2 R9.2
NetR19_1: R19.1 U3.3
NetR20_1: R20.1 U3.10
NetU1_1: U1.1 X1.2
NetU1_2: U1.2 X1.1
Neutral: CR4.1 P6.1 R1.2 R7.1 R11.2
P1: P3.1 Ry1.4
Relay: U3.16
Reset: C1.1 R2.1 U1.3
RX: U1.14
TX: U1.13
VB_DIG: C27.1 U3.35
VB_RAM: C26.1 U3.25
VB_RF: L3.1 U3.12 U3.14
VB_RF1: C28.1 C29.1
VB_SYNTH: C24.1 U3.6
VB_VCO: C25.1 U3.8
VCC: P8.8
VIN+: C5.1 C9.1 R9.1 U1.6
VIN-: C5.2 C10.2 R12.1 U1.7
W\P\: DNP1.1 P8.3 R21.1
XB_RX: U3.40
XB_TX: U3.38
XTAL_IN: C30.2 U3.5 X2.1
XTAL_OUT: C23.2 U3.4 X2.2
pads on no net: C22.1 P1.1 P1.2 P2.1 P2.2 Q1.1 Ry1.3 U3.7

## Text inside footprints (layer, text, board x,y; h text height)
LED1: Mechanical 1 "+" at 7160,1085 h10 r270
U1: Top Overlay "*" at 9759.5,1637 h50; Mechanical 13 "*" at 9800.5,1587 h50
U2: Top Overlay "*" at 7306.5,2347.05 h50; Mechanical 13 "*" at 7379.5,2327.05 h50